# EAGLE board SignalMast-Searchlight-SingleHead_array (EAGLE 7.7.0)
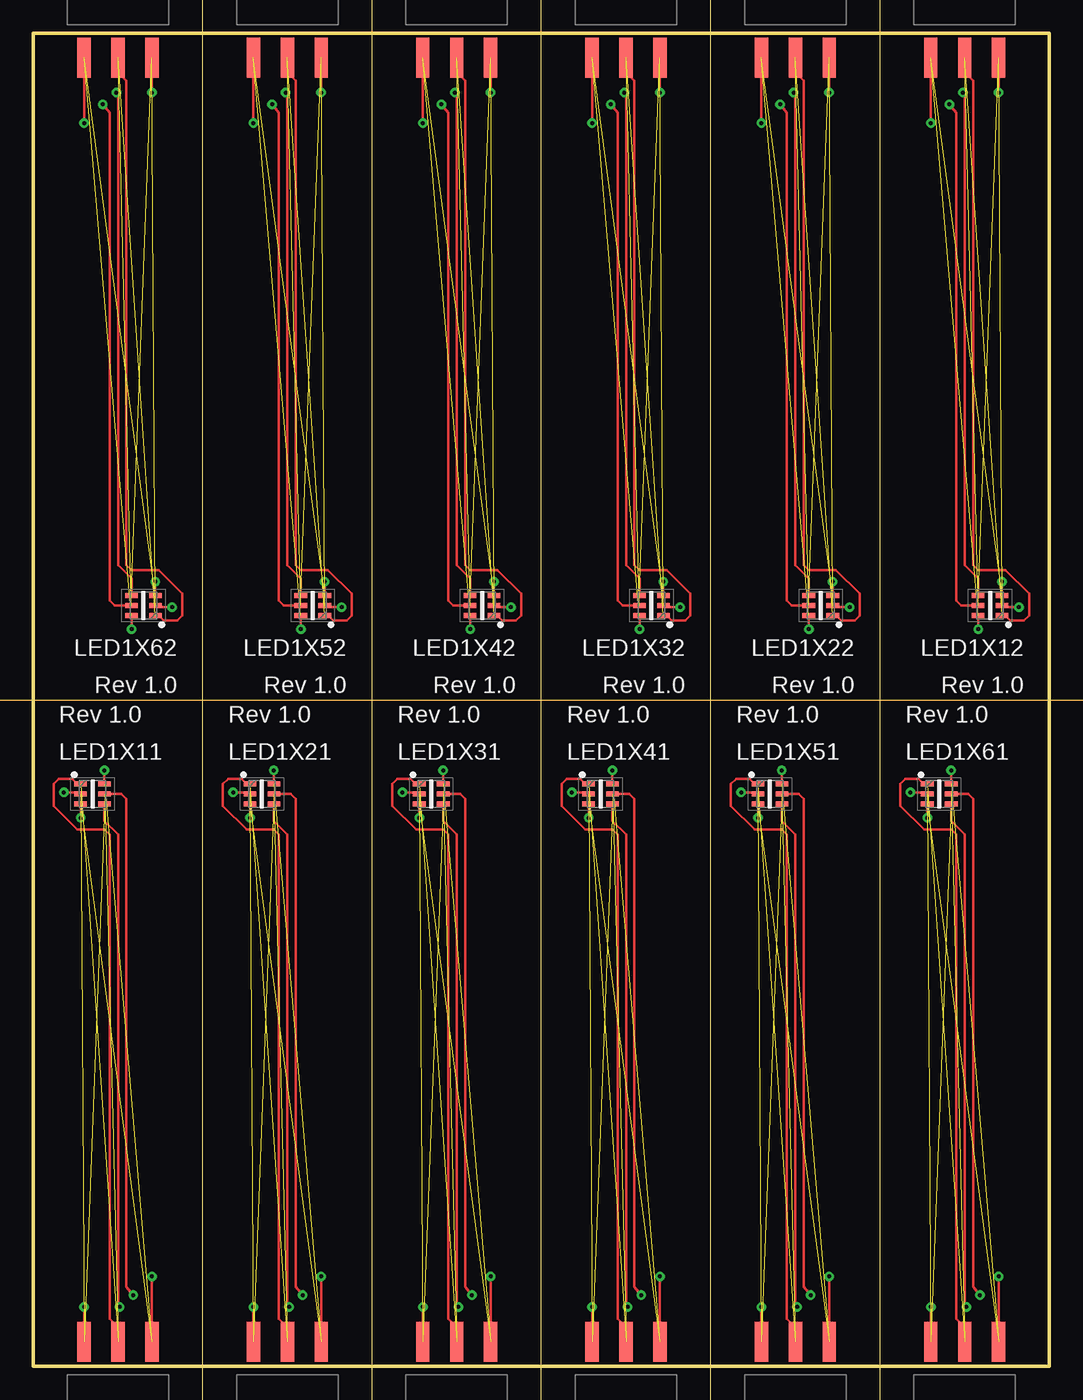
[diagram p0: board, top side]
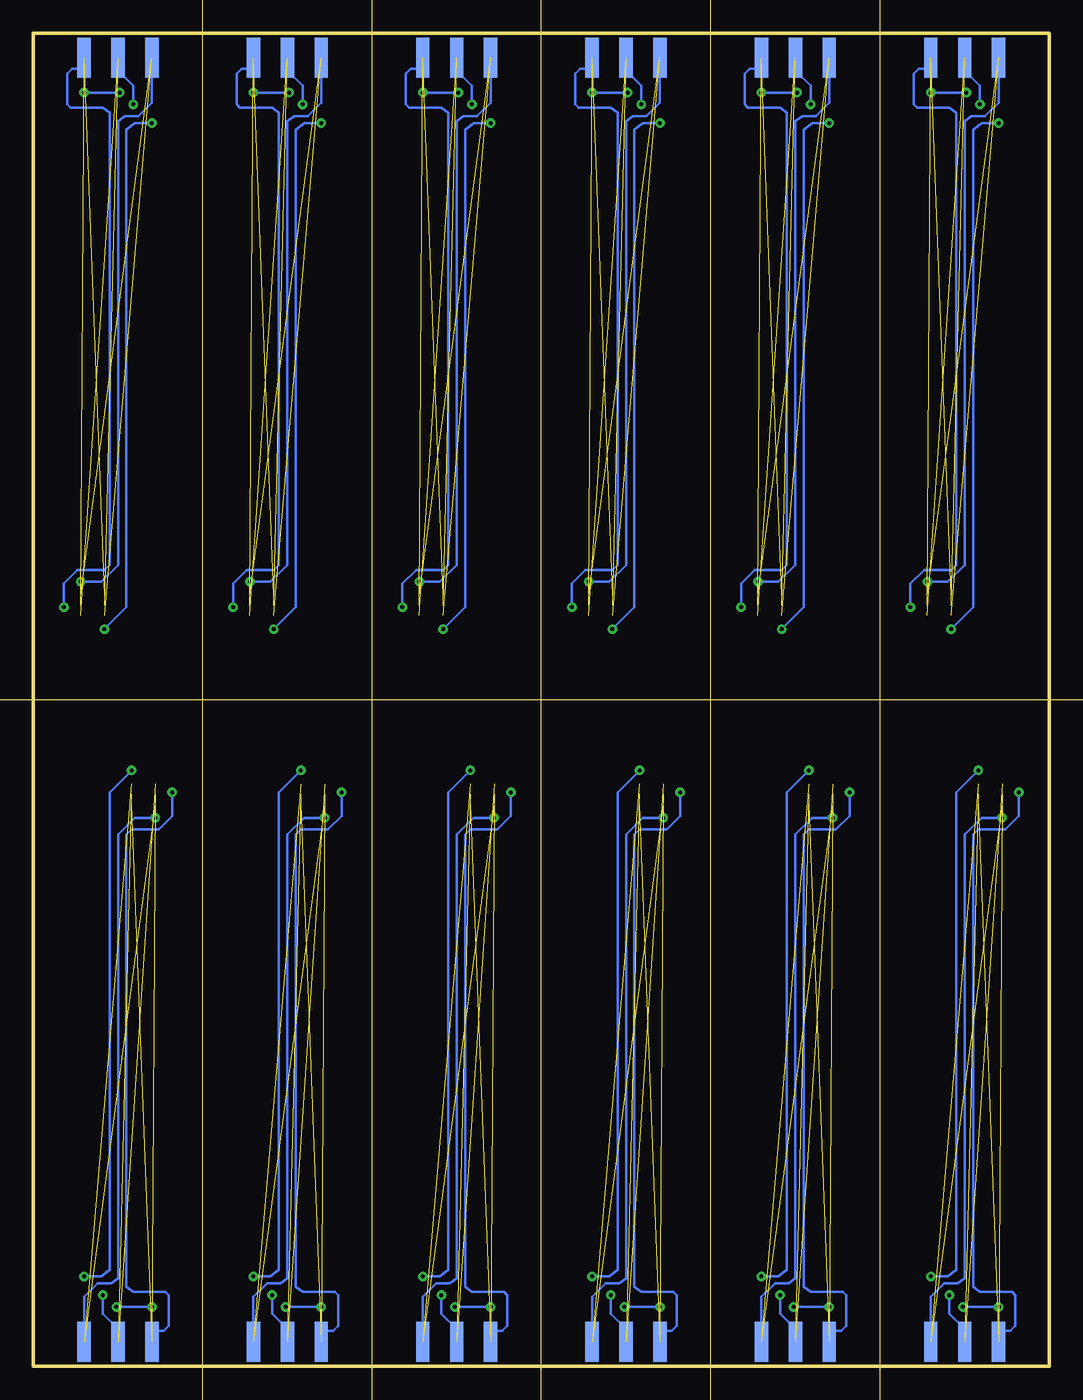
[diagram p1: board, bottom side, seen from below]

Size 76.2 x 100 mm. Coordinates in mm from the lower left corner, seen from the top.
Outline: 0,0 76.2,0 76.2,100 0,100 0,0
Copper layers (1*16): Top 0.035mm / dielectric 1.5mm / Bottom 0.035mm
Design rules "default": minimum track width 10mil, minimum drill 0.6mm, track to track 8mil, track to pad 8mil, pad to pad 8mil, via to via 8mil, smd to smd 8mil, copper to edge 40mil, drill to drill 8mil, minimum pad ring 10mil, minimum via ring 8mil, stop-mask expansion 4mil, vias tented up to drill 0mil, thermal gap 10mil
Milling: 6 lines

## Footprints (pad centres in the part's own frame; a part is rotated, then mirrored left to right if it is on the bottom)
2X3-SMD_EDGE = smd 1 x 3: 1 -2.54,-0.08; 3 0,-0.08; 5 2.54,-0.08 | smd 1 x 3 bottom: 2 -2.54,-0.08; 4 0,-0.08; 6 2.54,-0.08
APA102 = smd 0.95 x 0.4: 1 -0.9,0.75; 2 -0.9,0; 3 -0.9,-0.75; 4 0.9,-0.75; 5 0.9,0; 6 0.9,0.75

## Placement (x,y rotation side)
CON1X11  2x3-0.100  [2X3-SMD_EDGE]  6.35,1.91 0 top
CON1X12  2x3-0.100  [2X3-SMD_EDGE]  69.85,98.09 180 top
CON1X21  2x3-0.100  [2X3-SMD_EDGE]  19.05,1.91 0 top
CON1X22  2x3-0.100  [2X3-SMD_EDGE]  57.15,98.09 180 top
CON1X31  2x3-0.100  [2X3-SMD_EDGE]  31.75,1.91 0 top
CON1X32  2x3-0.100  [2X3-SMD_EDGE]  44.45,98.09 180 top
CON1X41  2x3-0.100  [2X3-SMD_EDGE]  44.45,1.91 0 top
CON1X42  2x3-0.100  [2X3-SMD_EDGE]  31.75,98.09 180 top
CON1X51  2x3-0.100  [2X3-SMD_EDGE]  57.15,1.91 0 top
CON1X52  2x3-0.100  [2X3-SMD_EDGE]  19.05,98.09 180 top
CON1X61  2x3-0.100  [2X3-SMD_EDGE]  69.85,1.91 0 top
CON1X62  2x3-0.100  [2X3-SMD_EDGE]  6.35,98.09 180 top
LED1X11  RGB  [APA102]  4.45,42.93 0 top
LED1X12  RGB  [APA102]  71.75,57.07 180 top
LED1X21  RGB  [APA102]  17.14,42.93 0 top
LED1X22  RGB  [APA102]  59.05,57.07 180 top
LED1X31  RGB  [APA102]  29.84,42.93 0 top
LED1X32  RGB  [APA102]  46.35,57.07 180 top
LED1X41  RGB  [APA102]  42.55,42.93 0 top
LED1X42  RGB  [APA102]  33.66,57.07 180 top
LED1X51  RGB  [APA102]  55.24,42.93 0 top
LED1X52  RGB  [APA102]  20.95,57.07 180 top
LED1X61  RGB  [APA102]  67.94,42.93 0 top
LED1X62  RGB  [APA102]  8.26,57.07 180 top

## Library data of the parts
CON1X11 CON1X12 CON1X21 CON1X22 CON1X31 CON1X32 CON1X41 CON1X42 CON1X51 CON1X52 CON1X61 CON1X62 LED1X11 LED1X12 LED1X21 LED1X22 LED1X31 LED1X32 LED1X41 LED1X42 LED1X51 LED1X52 LED1X61 LED1X62 = SPCoast

## Nets
CINX11: CON1X11.2 LED1X11.2
CINX12: CON1X12.2 LED1X12.2
CINX21: CON1X21.2 LED1X21.2
CINX22: CON1X22.2 LED1X22.2
CINX31: CON1X31.2 LED1X31.2
CINX32: CON1X32.2 LED1X32.2
CINX41: CON1X41.2 LED1X41.2
CINX42: CON1X42.2 LED1X42.2
CINX51: CON1X51.2 LED1X51.2
CINX52: CON1X52.2 LED1X52.2
CINX61: CON1X61.2 LED1X61.2
CINX62: CON1X62.2 LED1X62.2
COUTX11: CON1X11.4 LED1X11.5
COUTX12: CON1X12.4 LED1X12.5
COUTX21: CON1X21.4 LED1X21.5
COUTX22: CON1X22.4 LED1X22.5
COUTX31: CON1X31.4 LED1X31.5
COUTX32: CON1X32.4 LED1X32.5
COUTX41: CON1X41.4 LED1X41.5
COUTX42: CON1X42.4 LED1X42.5
COUTX51: CON1X51.4 LED1X51.5
COUTX52: CON1X52.4 LED1X52.5
COUTX61: CON1X61.4 LED1X61.5
COUTX62: CON1X62.4 LED1X62.5
DINX11: CON1X11.3 LED1X11.1
DINX12: CON1X12.3 LED1X12.1
DINX21: CON1X21.3 LED1X21.1
DINX22: CON1X22.3 LED1X22.1
DINX31: CON1X31.3 LED1X31.1
DINX32: CON1X32.3 LED1X32.1
DINX41: CON1X41.3 LED1X41.1
DINX42: CON1X42.3 LED1X42.1
DINX51: CON1X51.3 LED1X51.1
DINX52: CON1X52.3 LED1X52.1
DINX61: CON1X61.3 LED1X61.1
DINX62: CON1X62.3 LED1X62.1
DOUTX11: CON1X11.5 LED1X11.6
DOUTX12: CON1X12.5 LED1X12.6
DOUTX21: CON1X21.5 LED1X21.6
DOUTX22: CON1X22.5 LED1X22.6
DOUTX31: CON1X31.5 LED1X31.6
DOUTX32: CON1X32.5 LED1X32.6
DOUTX41: CON1X41.5 LED1X41.6
DOUTX42: CON1X42.5 LED1X42.6
DOUTX51: CON1X51.5 LED1X51.6
DOUTX52: CON1X52.5 LED1X52.6
DOUTX61: CON1X61.5 LED1X61.6
DOUTX62: CON1X62.5 LED1X62.6
GNDX11: CON1X11.6 LED1X11.3
GNDX12: CON1X12.6 LED1X12.3
GNDX21: CON1X21.6 LED1X21.3
GNDX22: CON1X22.6 LED1X22.3
GNDX31: CON1X31.6 LED1X31.3
GNDX32: CON1X32.6 LED1X32.3
GNDX41: CON1X41.6 LED1X41.3
GNDX42: CON1X42.6 LED1X42.3
GNDX51: CON1X51.6 LED1X51.3
GNDX52: CON1X52.6 LED1X52.3
GNDX61: CON1X61.6 LED1X61.3
GNDX62: CON1X62.6 LED1X62.3
VCCX11: CON1X11.1 LED1X11.4
VCCX12: CON1X12.1 LED1X12.4
VCCX21: CON1X21.1 LED1X21.4
VCCX22: CON1X22.1 LED1X22.4
VCCX31: CON1X31.1 LED1X31.4
VCCX32: CON1X32.1 LED1X32.4
VCCX41: CON1X41.1 LED1X41.4
VCCX42: CON1X42.1 LED1X42.4
VCCX51: CON1X51.1 LED1X51.4
VCCX52: CON1X52.1 LED1X52.4
VCCX61: CON1X61.1 LED1X61.4
VCCX62: CON1X62.1 LED1X62.4

## Tracks (layer width: path | path; a pad name or v marks a point on that pad's centre or on a via)
CINX11  (via drill 0.3 pad 0.71)  (1 unrouted)
  Top 0.203: v2.29,43.05 3.42,43.05 LED1X11.2
  Bottom 0.203: CON1X11.2 3.81,2.67 2.92,2.67 2.54,3.05 2.54,5.33 2.79,5.59 5.21,5.59 5.71,5.97 5.71,39.88 5.33,40.26 3.3,40.26 2.29,41.27 v2.29,43.05
CINX12  (via drill 0.3 pad 0.71)  (1 unrouted)
  Top 0.203: v73.91,56.95 72.78,56.95 LED1X12.2
  Bottom 0.203: CON1X12.2 72.39,97.33 73.28,97.33 73.66,96.95 73.66,94.67 73.41,94.41 70.99,94.41 70.48,94.03 70.48,60.12 70.87,59.74 72.9,59.74 73.91,58.73 v73.91,56.95
CINX21  (via drill 0.3 pad 0.71)  (1 unrouted)
  Top 0.203: v14.99,43.05 16.12,43.05 LED1X21.2
  Bottom 0.203: CON1X21.2 16.51,2.67 15.62,2.67 15.24,3.05 15.24,5.33 15.49,5.59 17.91,5.59 18.41,5.97 18.41,39.88 18.03,40.26 16,40.26 14.99,41.27 v14.99,43.05
CINX22  (via drill 0.3 pad 0.71)  (1 unrouted)
  Top 0.203: v61.21,56.95 60.08,56.95 LED1X22.2
  Bottom 0.203: CON1X22.2 59.69,97.33 60.58,97.33 60.96,96.95 60.96,94.67 60.71,94.41 58.29,94.41 57.78,94.03 57.78,60.12 58.17,59.74 60.2,59.74 61.21,58.73 v61.21,56.95
CINX31  (via drill 0.3 pad 0.71)  (1 unrouted)
  Top 0.203: v27.69,43.05 28.82,43.05 LED1X31.2
  Bottom 0.203: CON1X31.2 29.21,2.67 28.32,2.67 27.94,3.05 27.94,5.33 28.19,5.59 30.61,5.59 31.11,5.97 31.11,39.88 30.73,40.26 28.7,40.26 27.69,41.27 v27.69,43.05
CINX32  (via drill 0.3 pad 0.71)  (1 unrouted)
  Top 0.203: v48.51,56.95 47.38,56.95 LED1X32.2
  Bottom 0.203: CON1X32.2 46.99,97.33 47.88,97.33 48.26,96.95 48.26,94.67 48.01,94.41 45.59,94.41 45.09,94.03 45.09,60.12 45.47,59.74 47.5,59.74 48.51,58.73 v48.51,56.95
CINX41  (via drill 0.3 pad 0.71)  (1 unrouted)
  Top 0.203: v40.39,43.05 41.52,43.05 LED1X41.2
  Bottom 0.203: CON1X41.2 41.91,2.67 41.02,2.67 40.64,3.05 40.64,5.33 40.89,5.59 43.31,5.59 43.81,5.97 43.81,39.88 43.43,40.26 41.4,40.26 40.39,41.27 v40.39,43.05
CINX42  (via drill 0.3 pad 0.71)  (1 unrouted)
  Top 0.203: v35.81,56.95 34.68,56.95 LED1X42.2
  Bottom 0.203: CON1X42.2 34.29,97.33 35.18,97.33 35.56,96.95 35.56,94.67 35.31,94.41 32.89,94.41 32.38,94.03 32.38,60.12 32.77,59.74 34.8,59.74 35.81,58.73 v35.81,56.95
CINX51  (via drill 0.3 pad 0.71)  (1 unrouted)
  Top 0.203: v53.09,43.05 54.22,43.05 LED1X51.2
  Bottom 0.203: CON1X51.2 54.61,2.67 53.72,2.67 53.34,3.05 53.34,5.33 53.59,5.59 56.01,5.59 56.52,5.97 56.52,39.88 56.13,40.26 54.1,40.26 53.09,41.27 v53.09,43.05
CINX52  (via drill 0.3 pad 0.71)  (1 unrouted)
  Top 0.203: v23.11,56.95 21.98,56.95 LED1X52.2
  Bottom 0.203: CON1X52.2 21.59,97.33 22.48,97.33 22.86,96.95 22.86,94.67 22.61,94.41 20.19,94.41 19.68,94.03 19.68,60.12 20.07,59.74 22.1,59.74 23.11,58.73 v23.11,56.95
CINX61  (via drill 0.3 pad 0.71)  (1 unrouted)
  Top 0.203: v65.79,43.05 66.92,43.05 LED1X61.2
  Bottom 0.203: CON1X61.2 67.31,2.67 66.42,2.67 66.04,3.05 66.04,5.33 66.29,5.59 68.71,5.59 69.22,5.97 69.22,39.88 68.83,40.26 66.8,40.26 65.79,41.27 v65.79,43.05
CINX62  (via drill 0.3 pad 0.71)  (1 unrouted)
  Top 0.203: v10.41,56.95 9.28,56.95 LED1X62.2
  Bottom 0.203: CON1X62.2 8.89,97.33 9.78,97.33 10.16,96.95 10.16,94.67 9.91,94.41 7.49,94.41 6.99,94.03 6.99,60.12 7.37,59.74 9.4,59.74 10.41,58.73 v10.41,56.95
COUTX11  (via drill 0.3 pad 0.71)  (1 unrouted)
  Top 0.203: LED1X11.5 6.6,42.93 6.99,42.55 6.99,5.97 v7.49,5.33
  Bottom 0.203: v7.49,5.33 7.49,3.94 6.35,2.79 CON1X11.4
COUTX12  (via drill 0.3 pad 0.71)  (1 unrouted)
  Top 0.203: LED1X12.5 69.6,57.07 69.22,57.45 69.22,94.03 v68.71,94.67
  Bottom 0.203: v68.71,94.67 68.71,96.06 69.85,97.21 CON1X12.4
COUTX21  (via drill 0.3 pad 0.71)  (1 unrouted)
  Top 0.203: LED1X21.5 19.3,42.93 19.68,42.55 19.68,5.97 v20.19,5.33
  Bottom 0.203: v20.19,5.33 20.19,3.94 19.05,2.79 CON1X21.4
COUTX22  (via drill 0.3 pad 0.71)  (1 unrouted)
  Top 0.203: LED1X22.5 56.9,57.07 56.52,57.45 56.52,94.03 v56.01,94.67
  Bottom 0.203: v56.01,94.67 56.01,96.06 57.15,97.21 CON1X22.4
COUTX31  (via drill 0.3 pad 0.71)  (1 unrouted)
  Top 0.203: LED1X31.5 32,42.93 32.38,42.55 32.38,5.97 v32.89,5.33
  Bottom 0.203: v32.89,5.33 32.89,3.94 31.75,2.79 CON1X31.4
COUTX32  (via drill 0.3 pad 0.71)  (1 unrouted)
  Top 0.203: LED1X32.5 44.2,57.07 43.81,57.45 43.81,94.03 v43.31,94.67
  Bottom 0.203: v43.31,94.67 43.31,96.06 44.45,97.21 CON1X32.4
COUTX41  (via drill 0.3 pad 0.71)  (1 unrouted)
  Top 0.203: LED1X41.5 44.7,42.93 45.09,42.55 45.09,5.97 v45.59,5.33
  Bottom 0.203: v45.59,5.33 45.59,3.94 44.45,2.79 CON1X41.4
COUTX42  (via drill 0.3 pad 0.71)  (1 unrouted)
  Top 0.203: LED1X42.5 31.5,57.07 31.11,57.45 31.11,94.03 v30.61,94.67
  Bottom 0.203: v30.61,94.67 30.61,96.06 31.75,97.21 CON1X42.4
COUTX51  (via drill 0.3 pad 0.71)  (1 unrouted)
  Top 0.203: LED1X51.5 57.4,42.93 57.78,42.55 57.78,5.97 v58.29,5.33
  Bottom 0.203: v58.29,5.33 58.29,3.94 57.15,2.79 CON1X51.4
COUTX52  (via drill 0.3 pad 0.71)  (1 unrouted)
  Top 0.203: LED1X52.5 18.8,57.07 18.41,57.45 18.41,94.03 v17.91,94.67
  Bottom 0.203: v17.91,94.67 17.91,96.06 19.05,97.21 CON1X52.4
COUTX61  (via drill 0.3 pad 0.71)  (1 unrouted)
  Top 0.203: LED1X61.5 70.1,42.93 70.48,42.55 70.48,5.97 v70.99,5.33
  Bottom 0.203: v70.99,5.33 70.99,3.94 69.85,2.79 CON1X61.4
COUTX62  (via drill 0.3 pad 0.71)  (1 unrouted)
  Top 0.203: LED1X62.5 6.1,57.07 5.71,57.45 5.71,94.03 v5.21,94.67
  Bottom 0.203: v5.21,94.67 5.21,96.06 6.35,97.21 CON1X62.4
DINX11  (1 unrouted)
  Top 0.203: LED1X11.1 3.3,43.69 2.92,44.07 1.91,44.07 1.52,43.69 1.52,42.04 3.3,40.26 5.33,40.26 5.71,39.88 5.71,3.56 6.35,2.92 CON1X11.3
DINX12  (1 unrouted)
  Top 0.203: LED1X12.1 72.64,56.31 72.9,56.31 73.28,55.93 74.3,55.93 74.68,56.31 74.68,57.96 72.9,59.74 70.87,59.74 70.48,60.12 70.48,96.44 69.85,97.08 CON1X12.3
DINX21  (1 unrouted)
  Top 0.203: LED1X21.1 16,43.69 15.62,44.07 14.61,44.07 14.22,43.69 14.22,42.04 16,40.26 18.03,40.26 18.41,39.88 18.41,3.56 19.05,2.92 CON1X21.3
DINX22  (1 unrouted)
  Top 0.203: LED1X22.1 60.2,56.31 60.58,55.93 61.59,55.93 61.98,56.31 61.98,57.96 60.2,59.74 58.17,59.74 57.78,60.12 57.78,96.44 57.15,97.08 CON1X22.3
DINX31  (1 unrouted)
  Top 0.203: LED1X31.1 28.7,43.69 28.32,44.07 27.3,44.07 26.92,43.69 26.92,42.04 28.7,40.26 30.73,40.26 31.11,39.88 31.11,3.56 31.75,2.92 CON1X31.3
DINX32  (1 unrouted)
  Top 0.203: LED1X32.1 47.5,56.31 47.88,55.93 48.9,55.93 49.28,56.31 49.28,57.96 47.5,59.74 45.47,59.74 45.09,60.12 45.09,96.44 44.45,97.08 CON1X32.3
DINX41  (1 unrouted)
  Top 0.203: LED1X41.1 41.4,43.69 41.02,44.07 40.01,44.07 39.62,43.69 39.62,42.04 41.4,40.26 43.43,40.26 43.81,39.88 43.81,3.56 44.45,2.92 CON1X41.3
DINX42  (1 unrouted)
  Top 0.203: LED1X42.1 34.8,56.31 35.18,55.93 36.2,55.93 36.58,56.31 36.58,57.96 34.8,59.74 32.77,59.74 32.38,60.12 32.38,96.44 31.75,97.08 CON1X42.3
DINX51  (1 unrouted)
  Top 0.203: LED1X51.1 54.36,43.69 54.1,43.69 53.72,44.07 52.7,44.07 52.32,43.69 52.32,42.04 54.1,40.26 56.13,40.26 56.52,39.88 56.52,3.56 57.15,2.92 CON1X51.3
DINX52  (1 unrouted)
  Top 0.203: LED1X52.1 22.1,56.31 22.48,55.93 23.5,55.93 23.88,56.31 23.88,57.96 22.1,59.74 20.07,59.74 19.68,60.12 19.68,96.44 19.05,97.08 CON1X52.3
DINX61  (1 unrouted)
  Top 0.203: LED1X61.1 67.06,43.69 66.8,43.69 66.42,44.07 65.41,44.07 65.02,43.69 65.02,42.04 66.8,40.26 68.83,40.26 69.22,39.88 69.22,3.56 69.85,2.92 CON1X61.3
DINX62  (1 unrouted)
  Top 0.203: LED1X62.1 9.14,56.31 9.4,56.31 9.78,55.93 10.79,55.93 11.18,56.31 11.18,57.96 9.4,59.74 7.37,59.74 6.99,60.12 6.99,96.44 6.35,97.08 CON1X62.3
DOUTX11  (via drill 0.3 pad 0.71)  (1 unrouted)
  Top 0.203: LED1X11.6 5.33,43.69 v5.33,44.7 | v8.89,6.73 CON1X11.5
  Bottom 0.203: v5.33,44.7 6.99,43.05 6.99,7.24 7.62,6.73 v8.89,6.73
DOUTX12  (via drill 0.3 pad 0.71)  (1 unrouted)
  Top 0.203: LED1X12.6 70.87,56.31 v70.87,55.3 | v67.31,93.27 CON1X12.5
  Bottom 0.203: v70.87,55.3 69.22,56.95 69.22,92.76 68.58,93.27 v67.31,93.27
DOUTX21  (via drill 0.3 pad 0.71)  (1 unrouted)
  Top 0.203: LED1X21.6 v18.03,44.7 | v21.59,6.73 CON1X21.5
  Bottom 0.203: v18.03,44.7 19.68,43.05 19.68,7.24 20.32,6.73 v21.59,6.73
DOUTX22  (via drill 0.3 pad 0.71)  (1 unrouted)
  Top 0.203: LED1X22.6 v58.17,55.3 | v54.61,93.27 CON1X22.5
  Bottom 0.203: v58.17,55.3 56.52,56.95 56.52,92.76 55.88,93.27 v54.61,93.27
DOUTX31  (via drill 0.3 pad 0.71)  (1 unrouted)
  Top 0.203: LED1X31.6 v30.73,44.7 | v34.29,6.73 CON1X31.5
  Bottom 0.203: v30.73,44.7 32.38,43.05 32.38,7.24 33.02,6.73 v34.29,6.73
DOUTX32  (via drill 0.3 pad 0.71)  (1 unrouted)
  Top 0.203: LED1X32.6 45.47,56.31 v45.47,55.3 | v41.91,93.27 CON1X32.5
  Bottom 0.203: v45.47,55.3 43.81,56.95 43.81,92.76 43.18,93.27 v41.91,93.27
DOUTX41  (via drill 0.3 pad 0.71)  (1 unrouted)
  Top 0.203: LED1X41.6 43.43,43.69 v43.43,44.7 | v46.99,6.73 CON1X41.5
  Bottom 0.203: v43.43,44.7 45.09,43.05 45.09,7.24 45.72,6.73 v46.99,6.73
DOUTX42  (via drill 0.3 pad 0.71)  (1 unrouted)
  Top 0.203: LED1X42.6 v32.77,55.3 | v29.21,93.27 CON1X42.5
  Bottom 0.203: v32.77,55.3 31.11,56.95 31.11,92.76 30.48,93.27 v29.21,93.27
DOUTX51  (via drill 0.3 pad 0.71)  (1 unrouted)
  Top 0.203: LED1X51.6 v56.13,44.7 | v59.69,6.73 CON1X51.5
  Bottom 0.203: v56.13,44.7 57.78,43.05 57.78,7.24 58.42,6.73 v59.69,6.73
DOUTX52  (via drill 0.3 pad 0.71)  (1 unrouted)
  Top 0.203: LED1X52.6 20.07,56.31 v20.07,55.3 | v16.51,93.27 CON1X52.5
  Bottom 0.203: v20.07,55.3 18.41,56.95 18.41,92.76 17.78,93.27 v16.51,93.27
DOUTX61  (via drill 0.3 pad 0.71)  (1 unrouted)
  Top 0.203: LED1X61.6 v68.83,44.7 | v72.39,6.73 CON1X61.5
  Bottom 0.203: v68.83,44.7 70.48,43.05 70.48,7.24 71.12,6.73 v72.39,6.73
DOUTX62  (via drill 0.3 pad 0.71)  (1 unrouted)
  Top 0.203: LED1X62.6 v7.37,55.3 | v3.81,93.27 CON1X62.5
  Bottom 0.203: v7.37,55.3 5.71,56.95 5.71,92.76 5.08,93.27 v3.81,93.27
GNDX11  (via drill 0.3 pad 0.71)  (1 unrouted)
  Top 0.203: v3.56,41.15 3.56,42.16 LED1X11.3
  Bottom 0.203: CON1X11.6 8.89,5.21 7.87,6.22 6.86,6.22 6.35,6.6 6.35,39.88 5.08,41.15 v3.56,41.15
GNDX12  (via drill 0.3 pad 0.71)  (1 unrouted)
  Top 0.203: v72.64,58.85 72.64,57.84 LED1X12.3
  Bottom 0.203: CON1X12.6 67.31,94.79 68.33,93.78 69.34,93.78 69.85,93.4 69.85,60.12 71.12,58.85 v72.64,58.85
GNDX21  (via drill 0.3 pad 0.71)  (1 unrouted)
  Top 0.203: v16.26,41.15 16.26,42.16 LED1X21.3
  Bottom 0.203: CON1X21.6 21.59,5.21 20.57,6.22 19.56,6.22 19.05,6.6 19.05,39.88 17.78,41.15 v16.26,41.15
GNDX22  (via drill 0.3 pad 0.71)  (1 unrouted)
  Top 0.203: v59.94,58.85 59.94,57.84 LED1X22.3
  Bottom 0.203: CON1X22.6 54.61,94.79 55.63,93.78 56.64,93.78 57.15,93.4 57.15,60.12 58.42,58.85 v59.94,58.85
GNDX31  (via drill 0.3 pad 0.71)  (1 unrouted)
  Top 0.203: v28.96,41.15 28.96,42.16 LED1X31.3
  Bottom 0.203: CON1X31.6 34.29,5.21 33.27,6.22 32.26,6.22 31.75,6.6 31.75,39.88 30.48,41.15 v28.96,41.15
GNDX32  (via drill 0.3 pad 0.71)  (1 unrouted)
  Top 0.203: v47.24,58.85 47.24,57.84 LED1X32.3
  Bottom 0.203: CON1X32.6 41.91,94.79 42.93,93.78 43.94,93.78 44.45,93.4 44.45,60.12 45.72,58.85 v47.24,58.85
GNDX41  (via drill 0.3 pad 0.71)  (1 unrouted)
  Top 0.203: v41.66,41.15 41.66,42.16 LED1X41.3
  Bottom 0.203: CON1X41.6 46.99,5.21 45.97,6.22 44.96,6.22 44.45,6.6 44.45,39.88 43.18,41.15 v41.66,41.15
GNDX42  (via drill 0.3 pad 0.71)  (1 unrouted)
  Top 0.203: v34.54,58.85 34.54,57.84 LED1X42.3
  Bottom 0.203: CON1X42.6 29.21,94.79 30.23,93.78 31.24,93.78 31.75,93.4 31.75,60.12 33.02,58.85 v34.54,58.85
GNDX51  (via drill 0.3 pad 0.71)  (1 unrouted)
  Top 0.203: v54.36,41.15 54.36,42.16 LED1X51.3
  Bottom 0.203: CON1X51.6 59.69,5.21 58.67,6.22 57.66,6.22 57.15,6.6 57.15,39.88 55.88,41.15 v54.36,41.15
GNDX52  (via drill 0.3 pad 0.71)  (1 unrouted)
  Top 0.203: v21.84,58.85 21.84,57.84 LED1X52.3
  Bottom 0.203: CON1X52.6 16.51,94.79 17.53,93.78 18.54,93.78 19.05,93.4 19.05,60.12 20.32,58.85 v21.84,58.85
GNDX61  (via drill 0.3 pad 0.71)  (1 unrouted)
  Top 0.203: v67.06,41.15 67.06,42.16 LED1X61.3
  Bottom 0.203: CON1X61.6 72.39,5.21 71.37,6.22 70.36,6.22 69.85,6.6 69.85,39.88 68.58,41.15 v67.06,41.15
GNDX62  (via drill 0.3 pad 0.71)  (1 unrouted)
  Top 0.203: v9.14,58.85 9.14,57.84 LED1X62.3
  Bottom 0.203: CON1X62.6 3.81,94.79 4.83,93.78 5.84,93.78 6.35,93.4 6.35,60.12 7.62,58.85 v9.14,58.85
VCCX11  (via drill 0.3 pad 0.71)  (1 unrouted)
  Top 0.203: CON1X11.1 v3.81,4.45 | LED1X11.4 5.33,42.16 5.33,40.89 6.35,39.88 6.35,4.83 v6.48,4.45
  Bottom 0.203: v3.81,4.45 v6.48,4.45
VCCX12  (via drill 0.3 pad 0.71)  (1 unrouted)
  Top 0.203: CON1X12.1 v72.39,95.56 | LED1X12.4 70.87,57.84 70.87,59.11 69.85,60.12 69.85,95.17 v69.72,95.56
  Bottom 0.203: v72.39,95.56 v69.72,95.56
VCCX21  (via drill 0.3 pad 0.71)  (1 unrouted)
  Top 0.203: CON1X21.1 v16.51,4.45 | LED1X21.4 18.03,42.16 18.03,40.89 19.05,39.88 19.05,4.83 v19.18,4.45
  Bottom 0.203: v16.51,4.45 v19.18,4.45
VCCX22  (via drill 0.3 pad 0.71)  (1 unrouted)
  Top 0.203: CON1X22.1 v59.69,95.56 | LED1X22.4 58.17,57.84 58.17,59.11 57.15,60.12 57.15,95.17 v57.02,95.56
  Bottom 0.203: v59.69,95.56 v57.02,95.56
VCCX31  (via drill 0.3 pad 0.71)  (1 unrouted)
  Top 0.203: CON1X31.1 v29.21,4.45 | LED1X31.4 30.73,42.16 30.73,40.89 31.75,39.88 31.75,4.83 v31.88,4.45
  Bottom 0.203: v29.21,4.45 v31.88,4.45
VCCX32  (via drill 0.3 pad 0.71)  (1 unrouted)
  Top 0.203: CON1X32.1 v46.99,95.56 | LED1X32.4 45.47,57.84 45.47,59.11 44.45,60.12 44.45,95.17 v44.32,95.56
  Bottom 0.203: v46.99,95.56 v44.32,95.56
VCCX41  (via drill 0.3 pad 0.71)  (1 unrouted)
  Top 0.203: CON1X41.1 v41.91,4.45 | LED1X41.4 43.43,42.16 43.43,40.89 44.45,39.88 44.45,4.83 v44.58,4.45
  Bottom 0.203: v41.91,4.45 v44.58,4.45
VCCX42  (via drill 0.3 pad 0.71)  (1 unrouted)
  Top 0.203: CON1X42.1 v34.29,95.56 | LED1X42.4 32.77,57.84 32.77,59.11 31.75,60.12 31.75,95.17 v31.62,95.56
  Bottom 0.203: v34.29,95.56 v31.62,95.56
VCCX51  (via drill 0.3 pad 0.71)  (1 unrouted)
  Top 0.203: CON1X51.1 v54.61,4.45 | LED1X51.4 56.13,42.16 56.13,40.89 57.15,39.88 57.15,4.83 v57.28,4.45
  Bottom 0.203: v54.61,4.45 v57.28,4.45
VCCX52  (via drill 0.3 pad 0.71)  (1 unrouted)
  Top 0.203: CON1X52.1 v21.59,95.56 | LED1X52.4 20.07,57.84 20.07,59.11 19.05,60.12 19.05,95.17 v18.92,95.56
  Bottom 0.203: v21.59,95.56 v18.92,95.56
VCCX61  (via drill 0.3 pad 0.71)  (1 unrouted)
  Top 0.203: CON1X61.1 v67.31,4.45 | LED1X61.4 68.83,42.16 68.83,40.89 69.85,39.88 69.85,4.83 v69.98,4.45
  Bottom 0.203: v67.31,4.45 v69.98,4.45
VCCX62  (via drill 0.3 pad 0.71)  (1 unrouted)
  Top 0.203: CON1X62.1 v8.89,95.56 | LED1X62.4 7.37,57.84 7.37,59.11 6.35,60.12 6.35,95.17 v6.22,95.56
  Bottom 0.203: v8.89,95.56 v6.22,95.56

## Text on the board
tPlace: Rev 1.0 | Rev 1.0 | Rev 1.0 | Rev 1.0 | Rev 1.0 | Rev 1.0 | Rev 1.0 | Rev 1.0 | Rev 1.0 | Rev 1.0 | Rev 1.0 | Rev 1.0
Milling: V-Score | V-Score | V-Score | V-Score | V-Score | V-Score
Document: Black Soldermask / White Silkscreen | Black Soldermask / White Silkscreen | Black Soldermask / White Silkscreen | Black Soldermask / White Silkscreen | Black Soldermask / White Silkscreen | Black Soldermask / White Silkscreen | Black Soldermask / White Silkscreen | Black Soldermask / White Silkscreen | Black Soldermask / White Silkscreen | Black Soldermask / White Silkscreen | Black Soldermask / White Silkscreen | Black Soldermask / White Silkscreen